# Altium PCB PCB1_a.PcbDoc
Units mm, origin at the board's own origin, x right, y up, seen from the top; angles counter-clockwise.
Board outline 41 x 58.5 mm, 2 copper layers (Top Layer, Bottom Layer), stack 0.452 mm thick; 36 components, 22 nets, 158 pads, 21 vias.
Unrouted connection lines stored in the file: 1.
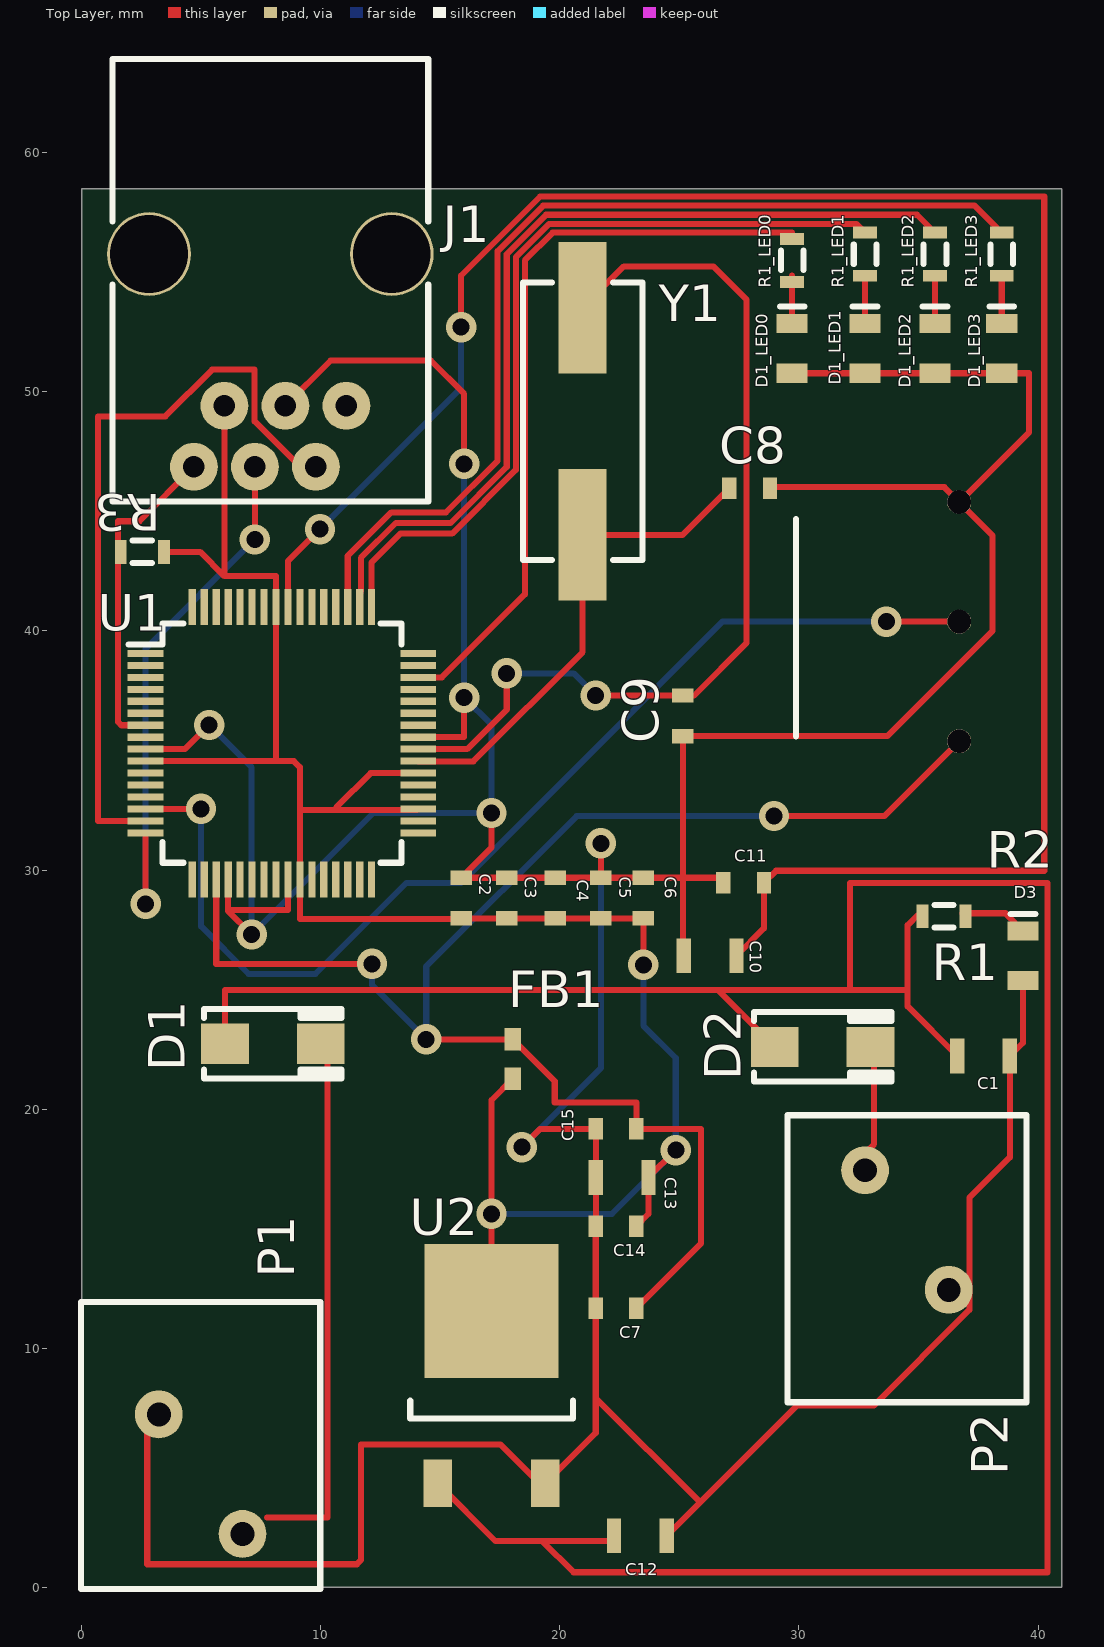
[diagram p0: Top Layer view]
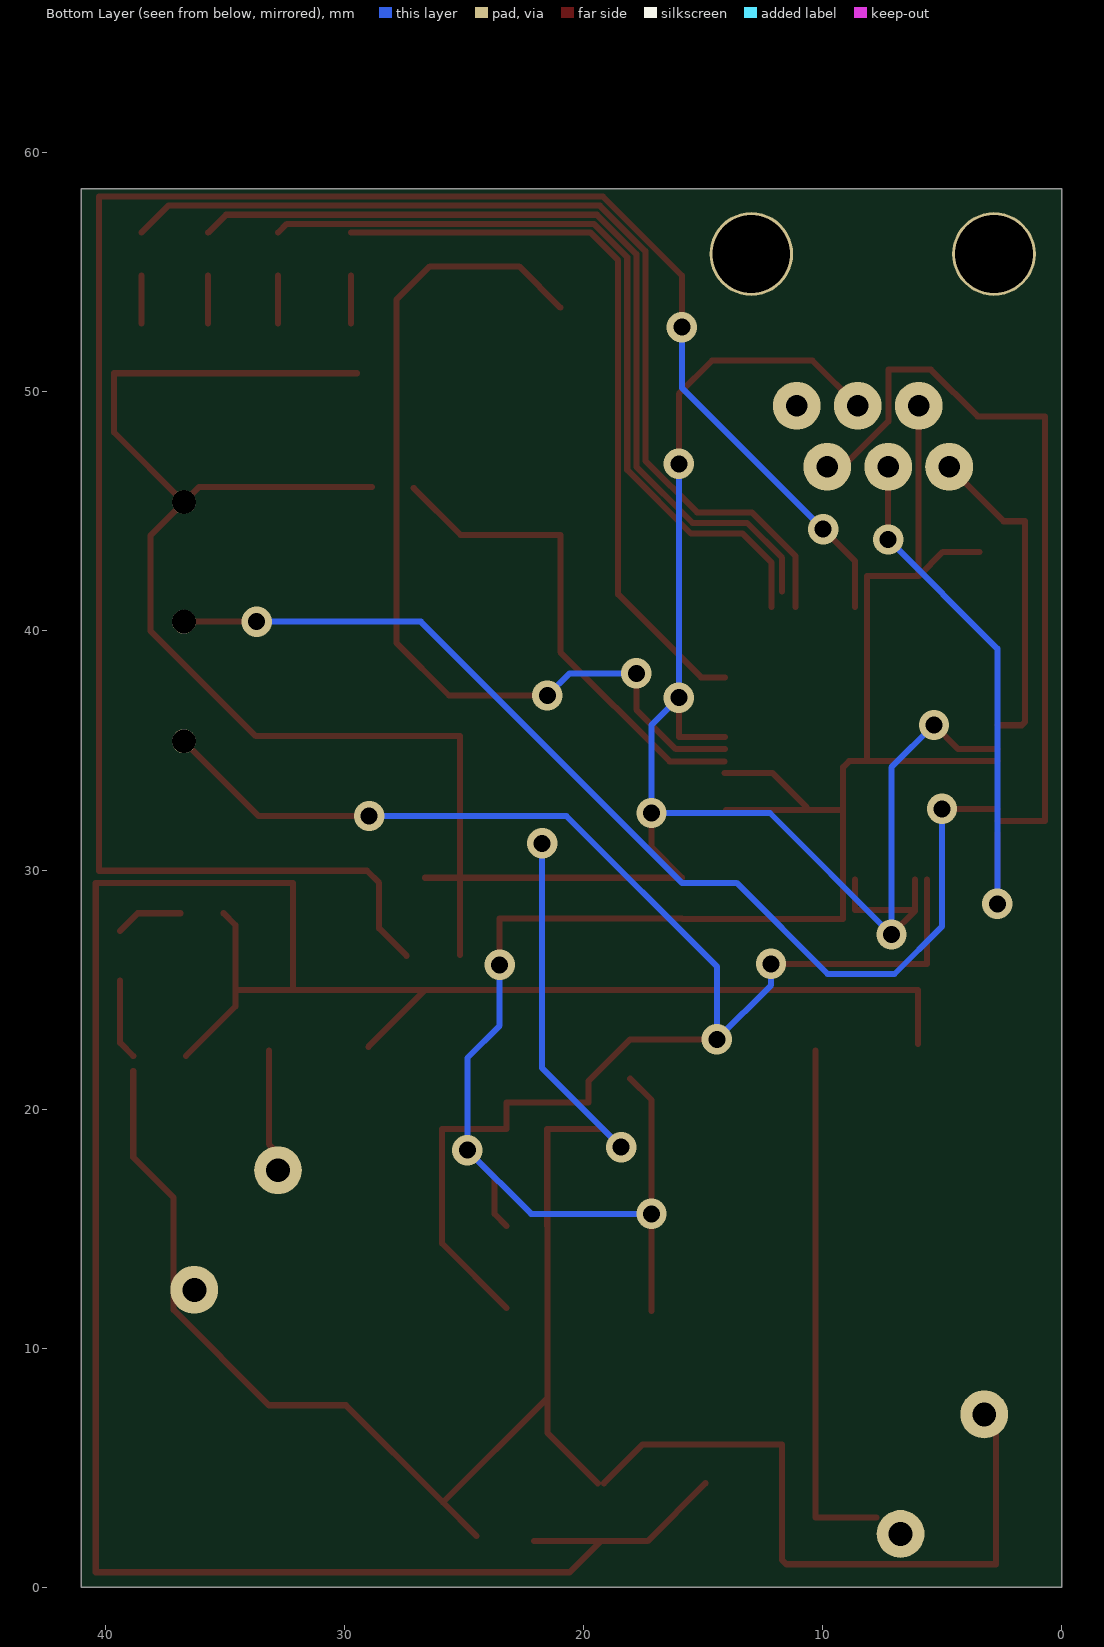
[diagram p1: Bottom Layer view, seen from below]

## Layer stack, top to bottom
Top Solder: solder mask 0.0102, Solder Resist, Dk 3.5
Top Layer: signal copper 0.0356
Dielectric 1: core 0.254, FR-4, Dk 4.2
Dielectric 2: core 0.127, FR-4, Dk 4.2
Bottom Layer: signal copper 0.0356
Bottom Solder: solder mask 0.0102, Solder Resist, Dk 3.5

## Board outline
0,0 41,0 41,58.5 0,58.5

## Design rules (kind name [scope] priority, off if disabled: settings)
Clearance [All] p1: gap=0.254
Height [All] p1: minheight=0 maxheight=21 prefheight=12.7
PolygonConnect [All] p1: connectstyle=Relief reliefconductorwidth=0.254 reliefentries=4 polygonreliefangle="90 Angle" airgapwidth=0.254
RoutingVias [All] p1: holewidth=0.711 width=1.27 viastyle="Through Hole" minholewidth=0.711 minwidth=1.27 maxholewidth=0.711 maxwidth=1.27
SolderMaskExpansion [All] p1: expansion=0.102
UnpouredPolygon [All] p1: allowunpoured=FALSE
Width [All] p1: maxlimit=5 minlimit=0.2 preferedwidth=0.2
28 further rules are at their usual default settings.

## Classes and differential pairs
component class LED0: D1_LED0 R1_LED0
component class LED1: D1_LED1 R1_LED1
component class LED2: D1_LED2 R1_LED2
component class LED3: D1_LED3 R1_LED3
component class PIC: C2 C3 C4 C5 C6 C7 C8 C9 C10 C11 J1 R3 U1 Y1
component class POWER: C1 C12 C13 C14 C15 D1 D2 D3 FB1 P1 P2 R1 U2
component class TP2: R2
net class LED[0..3]: LED0 LED1 LED2 LED3
channel class led: LED0 LED1 LED2 LED3

## Components (designator, comment, footprint, x,y, rotation, side; value= is the part's Value field where it differs from the comment)
C1 "10uF" CAPC2012N 37.719,22.225 r180 top
C2 "100nF" CAPC1608N 15.875,28.829 r270 top
C3 "100nF" CAPC1608N 17.78,28.829 r270 top
C4 "100nF" CAPC1608N 19.812,28.829 r270 top
C5 "100nF" CAPC1608N 21.717,28.829 r270 top
C6 "100nF" CAPC1608N 23.495,28.829 r270 top
C7 "100nF" CAPC1608N 22.352,11.684 r0 top
C8 "20pF" CAPC1608N 27.94,45.974 r180 top
C9 "20pF" CAPC1608N 25.146,36.449 r90 top
C10 "10uF" CAPC2012N 26.289,26.416 r0 top
C11 "1uF" CAPC1608N 27.686,29.464 r0 top
C12 "10uF" CAPC2012N 23.368,2.159 r180 top
C13 "10uF" CAPC2012N 22.606,17.145 r0 top
C14 "1uF" CAPC1608N 22.352,15.113 r0 top
C15 "100nF" CAPC1608N 22.352,19.177 r0 top
D1 "GF1A" SMA/DO-214AC_21 8.001,22.733 r180 top
D1_LED0 "Green LED" "LED 0805" 29.718,51.816 r270 top (schematic designator D1)
D1_LED1 "Green LED" "LED 0805" 32.766,51.816 r270 top (schematic designator D1)
D1_LED2 "Green LED" "LED 0805" 35.687,51.816 r270 top (schematic designator D1)
D1_LED3 "Green LED" "LED 0805" 38.481,51.816 r270 top (schematic designator D1)
D2 "GF1A" SMA/DO-214AC_21 30.988,22.606 r180 top
D3 "Green LED" "LED 0805" 39.37,26.416 r270 top
FB1 "600r" INDC1608AN 18.034,22.098 r90 top
J1 "Program / Debug" RJ12_90 4.699,46.863 r90 top
P1 "12V Main" PHOENIX_1985195 6.731,7.239 r180 top
P2 "12V Battery" PHOENIX_1985195 32.766,12.446 r0 top
R1 "470r" RESC1608N 36.068,28.067 r180 top
R1_LED0 "330r" RESC1608N 29.718,55.499 r90 top (schematic designator R1)
R1_LED1 "330r" RESC1608N 32.766,55.753 r90 top (schematic designator R1)
R1_LED2 "330r" RESC1608N 35.687,55.753 r90 top (schematic designator R1)
R1_LED3 "330r" RESC1608N 38.481,55.753 r90 top (schematic designator R1)
R2 "1K" PDB181-K415K-102A2 36.703,40.386 r90 top
R3 "4.7K" RESC1608N 2.54,43.307 r0 top
U1 "PIC32MX764F128H" QFP50P1200X1200X120-64 8.382,35.306 r0 top
U2 "AP1117" TD03B_N 17.145,11.557 r0 top
Y1 "8MHz" XTAL139X50X45 20.955,48.768 r270 top

## Footprints (in the part's own frame and the unit in brackets; to place one, negate y for a bottom-side part, rotate by r counter-clockwise, add the part's x,y. Pads: shape width x height; smd on the part's side, far side on the other; paste and mask are expansions set on the pad)
CAPC1608N [mm]
  rect 0.6x0.9 smd: 1(-0.85,0) 2(0.85,0)
CAPC2012N [mm]
  rect 0.6x1.45 smd: 1(-1.1,0) 2(1.1,0)
INDC1608AN [mm]
  rect 0.95x0.7 smd mask+0.102: 1(-0.825,0)
  rect 0.95x0.7 smd: 2(0.825,0)
"LED 0805" [mm]
  rect 0.8x1.3 smd: 1(-1.04,0) 2(1.04,0)
  rect 2.08x1.3 on Mech1: ""(0,0)
  silkscreen extent -1.75,-0.52 -1.75,0.52
PDB181-K415K-102A2 [mm]
  round 1 hole 1: 1(-5,0) 2(0,0) 3(5,0)
  silkscreen extent -4.8,6.83 4.3,6.83
PHOENIX_1985195 [mm]
  round 2 hole 1: 1(0,5) 2(3.5,0)
  silkscreen extent -3.25,-4.7 6.75,7.3
QFP50P1200X1200X120-64 [mm]
  rect 1.5x0.3 smd: 1(-5.7,3.75) 2(-5.7,3.25) 3(-5.7,2.75) 4(-5.7,2.25) 5(-5.7,1.75) 6(-5.7,1.25) 7(-5.7,0.75) 8(-5.7,0.25) 9(-5.7,-0.25) 10(-5.7,-0.75) 11(-5.7,-1.25) 12(-5.7,-1.75) 13(-5.7,-2.25) 14(-5.7,-2.75) 15(-5.7,-3.25) 16(-5.7,-3.75) 33(5.7,-3.75) 34(5.7,-3.25) 35(5.7,-2.75) 36(5.7,-2.25) 37(5.7,-1.75) 38(5.7,-1.25) 39(5.7,-0.75) 40(5.7,-0.25) 41(5.7,0.25) 42(5.7,0.75) 43(5.7,1.25) 44(5.7,1.75) 45(5.7,2.25) 46(5.7,2.75) 47(5.7,3.25) 48(5.7,3.75)
  rect 0.3x1.5 smd: 17(-3.75,-5.7) 18(-3.25,-5.7) 19(-2.75,-5.7) 20(-2.25,-5.7) 21(-1.75,-5.7) 22(-1.25,-5.7) 23(-0.75,-5.7) 24(-0.25,-5.7) 25(0.25,-5.7) 26(0.75,-5.7) 27(1.25,-5.7) 28(1.75,-5.7) 29(2.25,-5.7) 30(2.75,-5.7) 31(3.25,-5.7) 32(3.75,-5.7) 49(3.75,5.7) 50(3.25,5.7) 51(2.75,5.7) 52(2.25,5.7) 53(1.75,5.7) 54(1.25,5.7) 55(0.75,5.7) 56(0.25,5.7) 57(-0.25,5.7) 58(-0.75,5.7) 59(-1.25,5.7) 60(-1.75,5.7) 61(-2.25,5.7) 62(-2.75,5.7) 63(-3.25,5.7) 64(-3.75,5.7)
  rect 10x10 on Mech1: ""(0,0)
  silkscreen extent -6.43,-5 5,5
RESC1608N [mm]
  rect 0.5x1 smd: 1(-0.9,0) 2(0.9,0)
  silkscreen extent -0.4,-0.48 0.4,0.48
RJ12_90 [mm]
  round 2 hole 0.9: 1(0,0) 2(2.55,-1.275) 3(2.55,-3.825) 4(0,-2.55) 5(0,-5.1) 6(2.55,-6.375)
  round 1 on Mech2: 1(2.55,-1.275) 2(0,-2.55) 3(2.55,-3.825) 4(0,-5.1) 5(2.55,-6.375) 7(0,0)
  round 3.5 hole 3.25: 7(8.9,-8.275) 8(8.9,1.875)
  silkscreen extent -1.45,-9.8 17.05,3.4
SMA/DO-214AC_21 [mm]
  rect 2x1.68 smd: 1(-2,0) 2(2,0)
  rect 5.74x2.9 on Mech1: ""(0,0)
  silkscreen extent -2.88,-1.45 2.88,1.45
TD03B_N [mm]
  rect 1.2x2 smd: 1(2.25,-7.2) 3(-2.25,-7.2)
  rect 5.6x5.6 smd: 4(0,0)
  round 0.5 on Top Overlay: ""(-3.4,-7.2)
  rect 6.8x10.4 on Mech1: ""(0,-2.6)
  silkscreen extent -3.4,-4.5 3.4,-3.75
XTAL139X50X45 [mm] "Crystal, Thru-Hole; 2 Leads; Body 3.1 x 8.2 mm (Dia.xH)"
  rect 5.5x2 smd: 1(-4.75,0) 2(4.75,0)
  silkscreen extent -5.8,-2.5 5.8,2.5

## Part data
C1 C2 C3 C4 C5 C6 C7 C8 C9 C10 C11 C12 C13 C14 C15: library part Cap, "Capacitor"
D1 D2: library part Diode, "Default Diode"
D1_LED0 D1_LED1 D1_LED2 D1_LED3: library part LED0, "Typical INFRARED GaAs LED"
D3: library part LED2, "Typical RED, GREEN, YELLOW, AMBER GaAs LED"
FB1: library part Inductor, "Inductor"
J1: library part Component_1
P1 P2: library part "Header 2", "Header, 2-Pin"
R1 R1_LED0 R1_LED1 R1_LED2 R1_LED3 R3: library part Res1, "Resistor"
R2: library part RPot, "Potentiometer"
U2: "1A LDO, 18V input, DPAK"
Y1: library part XTAL, "Crystal Oscillator"

## Via types
v1: diameter 1.27, hole 0.711, Top Layer to Bottom Layer, 21 vias

## Nets (pads, with @x,y where several pads share a name; then routed paths per layer and width w, separated by ;. In a path a pad name is that pad's centre, name@x,y a point inside that pad or via, vN(x,y) a via of type N, cw(c..) or ccw(c..) an arc to the next point about the centre after c; other vN are vias at no path point)
ALIM: D1.1 P1.1 | length 22.1
  Top Layer w0.254: 7.747,2.921 10.287,2.921 D1.1@10.287,22.447
BATTERY: D2.1 P2.1 | length 5.3
  Top Layer w0.254: P2.1@32.131,17.526 33.147,18.542 D2.1@33.147,22.447
GND: C1.1 C2.1 C3.1 C4.1 C5.1 C6.1 C7.1 C8.1 C9.1 C10.1 C11.1 C12.1 C13.1 C14.1 C15.1 D1_LED0.2 D1_LED1.2 D1_LED2.2 D1_LED3.2 D3.2 J1.3@8.524,49.413 P1.2 P2.2 R2.3 U1.9 U1.20 U1.25 U1.41 U2.1 | length 229.1
  Top Layer w0.254: U1.9 4.322,35.056 v1(5.334,36.068) ; P1.2@2.747,6.421 2.747,0.969 11.51,0.969 11.684,1.143 11.684,5.969 17.526,5.969 U2.1@19.138,4.357 ; U1.20 6.132,28.285 v1(7.112,27.305) ; 6.172,28.325 8.632,28.325 U1.25 ; J1.3@8.524,49.413 10.419,51.308 14.605,51.308 16.002,49.911 v1(16.002,46.99) ; U1.41 15.998,35.556 ; 16.002,35.56 v1(16.002,37.211) ; v1(17.145,32.385) 17.145,30.949 C2.1 C3.1 C4.1 C5.1 ; v1(18.415,18.415) 19.177,19.177 C15.1 ; U2.1 21.502,6.464 21.502,7.919 ; C14.1 C7.1 21.502,7.919 ; C14.1@21.506,15.117 C13.1 C15.1@21.506,19.173 ; v1(21.717,31.115) C5.1 ; C12.1 25.865,3.556 ; C10.1@25.146,26.459 25.146,29.679 ; C11.1@26.621,29.679 25.146,29.679 ; C8.1@28.829,46.013 36.076,46.013 R2.3 ; D1_LED0.2@29.464,50.776 D1_LED0.2 D1_LED1.2 D1_LED2.2 D1_LED3.2 39.624,50.776 39.624,48.307 R2.3 ; C1.1@38.819,21.59 38.819,17.991 37.131,16.303 37.131,14.026 37.131,11.604 33.147,7.62 29.929,7.62 25.865,3.556 ; C1.1 39.37,22.776 D3.2 ; 21.502,7.919 25.865,3.556 ; C5.1 C6.1 25.146,29.679 ; 25.146,29.679 C9.1 33.694,35.599 38.1,40.005 38.1,43.989 R2.3
  Bottom Layer w0.254: v1(5.334,36.068) 7.112,34.29 v1(7.112,27.305) 12.192,32.385 v1(17.145,32.385) 17.145,36.068 v1(16.002,37.211) v1(16.002,46.99) ; v1(18.415,18.415) 21.717,21.717 v1(21.717,31.115)
LED0: R1_LED0.2 U1.46 | length 31.5
  Top Layer w0.254: U1.46 15.069,38.056 18.542,41.529 18.542,55.499 19.696,56.653 29.718,56.653
LED1: R1_LED1.2 U1.49 | length 33.7
  Top Layer w0.254: U1.49 12.132,42.866 13.335,44.069 15.494,44.069 18.161,46.736 18.161,55.626 19.558,57.023 32.396,57.023 R1_LED1.2
LED2: R1_LED2.2 U1.50 | length 36.9
  Top Layer w0.254: U1.50@11.684,41.656 11.684,43.053 13.144,44.514 15.43,44.514 17.78,46.863 17.78,55.753 19.431,57.404 34.936,57.404 R1_LED2.2
LED3: R1_LED3.2 U1.51 | length 41.1
  Top Layer w0.254: U1.51 11.132,43.136 12.954,44.958 15.24,44.958 17.399,47.117 17.399,55.88 19.304,57.785 37.349,57.785 R1_LED3.2
MCLR: J1.1@4.699,46.863 R3.1 U1.7 | length 13.7
  Top Layer w0.254: U1.7 1.663,36.056 1.524,36.195 1.524,44.588 2.424,44.588 J1.1@4.699,46.863
NetC10_2: C10.2 C11.2 U1.56 | length 86.3
  Top Layer w0.254: U1.56 8.632,42.922 v1(9.97,44.259) ; v1(15.875,52.705) 15.875,54.864 19.177,58.166 40.259,58.166 40.259,29.972 29.044,29.972 C11.2 28.536,27.563 C10.2
  Bottom Layer w0.254: v1(9.97,44.259) 15.875,50.165 v1(15.875,52.705)
NetD1_LED0_1: D1_LED0.1 R1_LED0.1 | length 2
  Top Layer w0.254: D1_LED0.1 29.718,54.853
NetD1_LED1_1: D1_LED1.1 R1_LED1.1 | length 2
  Top Layer w0.254: D1_LED1.1 R1_LED1.1
NetD1_LED2_1: D1_LED2.1 R1_LED2.1 | length 2
  Top Layer w0.254: D1_LED2.1 R1_LED2.1
NetD1_LED3_1: D1_LED3.1 R1_LED3.1 | length 2
  Top Layer w0.254: D1_LED3.1 R1_LED3.1
NetD3_1: D3.1 R1.1 | length 2.8
  Top Layer w0.254: R1.1@36.841,28.194 38.632,28.194 D3.1
NetR2_2: R2.2 U1.14 | length 45.9
  Top Layer w0.254: U1.14 v1(4.997,32.556) ; v1(33.655,40.386) R2.2
  Bottom Layer w0.254: v1(4.997,32.556) 4.997,27.642 6.985,25.654 9.779,25.654 13.589,29.464 15.875,29.464 26.797,40.386 v1(33.655,40.386)
PGC: J1.5@9.799,46.863 U1.15 | length 31.8
  Top Layer w0.254: U1.15 0.687,32.056 0.687,48.97 3.504,48.97 5.461,50.927 7.239,50.927 7.239,48.768 9.144,46.863 J1.5@9.799,46.863
PGD: J1.4@7.249,46.863 U1.16 | length 23.1
  Top Layer w0.254: v1(2.682,28.59) U1.16 ; v1(7.249,43.825) J1.4@7.249,46.863
  Bottom Layer w0.254: v1(2.682,28.59) 2.682,39.258 v1(7.249,43.825)
V3P3: C2.2 C3.2 C4.2 C5.2 C6.2 C13.2 C14.2 FB1.1 J1.2@5.974,49.413 R3.2 U1.10 U1.26 U1.35 U1.38 U1.57 U2.4 | length 89.2
  Top Layer w0.254: U1.10 8.878,34.556 9.132,34.302 9.132,32.512 ; R3.2 4.958,43.307 5.974,42.291 ; J1.2@5.974,49.413 5.974,42.291 ; 8.132,34.56 U1.57 8.132,42.291 5.974,42.291 ; U1.35@14.038,32.512 10.668,32.512 ; U1.38 12.085,34.056 10.668,32.639 10.668,32.512 ; C2.2@15.848,27.952 9.132,27.952 U1.26 9.132,32.512 ; C2.2 C3.2 C4.2 C5.2 C6.2 v1(23.495,26.035) ; U2.4 v1(17.145,15.621) 17.145,20.384 FB1.1 ; C14.2 23.706,15.617 C13.2 v1(24.849,18.288) ; 9.132,32.512 10.668,32.512
  Bottom Layer w0.254: v1(17.145,15.621) 22.182,15.621 v1(24.849,18.288) 24.849,22.141 23.495,23.495 v1(23.495,26.035)
V3P3A: C7.2 C15.2 FB1.2 R2.1 U1.19 | length 66.2
  Top Layer w0.254: U1.19 5.632,26.079 v1(12.148,26.079) ; v1(14.414,22.923) FB1.2 19.788,21.169 19.788,20.281 23.202,20.281 C15.2 25.908,19.177 25.908,14.39 C7.2 ; v1(28.956,32.258) 33.575,32.258 R2.1
  Bottom Layer w0.254: v1(12.148,26.079) 12.148,25.189 v1(14.414,22.923) 14.414,25.971 20.701,32.258 v1(28.956,32.258)
V5: C1.2 C12.2 D1.2 D2.2 R1.2 U2.3 | length 112.6
  Top Layer w0.254: D1.2 6.001,24.987 26.607,24.987 ; U2.3 17.311,1.941 19.268,1.941 ; C12.2@22.05,1.941 19.268,1.941 ; D2.2 26.607,24.987 ; R1.2@35.041,28.194 34.544,27.697 34.544,24.987 ; C1.2 34.544,24.3 34.544,24.987 ; 19.268,1.941 20.574,0.635 40.386,0.635 40.386,29.464 32.131,29.464 32.131,24.987 ; 26.607,24.987 32.131,24.987 ; 32.131,24.987 34.544,24.987
X1: C8.2 U1.39 Y1.2 | length 20.6
  Top Layer w0.254: U1.39@14.094,34.544 16.383,34.544 20.955,39.116 Y1.2 25.134,44.018 C8.2
X2: C9.2 U1.40 Y1.1 | length 39.7
  Top Layer w0.254: U1.40 16.125,35.056 17.78,36.711 v1(17.78,38.227) ; Y1.1 22.682,55.245 26.416,55.245 27.813,53.848 27.813,39.497 25.615,37.299 C9.2 v1(21.502,37.299)
  Bottom Layer w0.254: v1(17.78,38.227) 20.574,38.227 v1(21.502,37.299)
pads on no net: D1. D1_LED0. D1_LED1. D1_LED2. D1_LED3. D2. D3. J1.1@5.974,49.413 J1.2@7.249,46.863 J1.3@8.524,49.413 J1.4@9.799,46.863 J1.5@11.074,49.413 J1.6 J1.7 J1.8 U1. U1.1 U1.2 U1.3 U1.4 U1.5 U1.6 U1.8 U1.11 U1.12 U1.13 U1.17 U1.18 U1.21 U1.22 U1.23 U1.24 U1.27 U1.28 U1.29 U1.30 U1.31 U1.32 U1.33 U1.34 U1.36 U1.37 U1.42 U1.43 U1.44 U1.45 U1.47 U1.48 U1.52 U1.53 U1.54 U1.55 U1.58 U1.59 U1.60 U1.61 U1.62 U1.63 U1.64 U2.